# EAGLE board Prova 2 Conversor AD_DA (EAGLE 9.7.0)

Size 197.69 x 96.3 mm. Coordinates in mm from the lower left corner, seen from the top.
Outline: 0,0 197.69,0 197.69,96.3 0,96.3 0,0
Copper layers (1*16): Top 0.035mm / dielectric 1.5mm / Bottom 0.035mm
Design rules "default": minimum track width 6mil, minimum drill 0.35mm, track to track 6mil, track to pad 6mil, pad to pad 6mil, via to via 6mil, smd to smd 6mil, copper to edge 40mil, drill to drill 6mil, minimum pad ring 10mil, minimum via ring 8mil, stop-mask expansion 4mil, vias tented up to drill 0mil, thermal gap 10mil

## Footprints (pad centres in the part's own frame; a part is rotated, then mirrored left to right if it is on the bottom)
BATTERY-GENERIC = drill 1.118 pad 3.15 octagon: + 2.54,0; - -2.54,0
RESAD1016W63L850D250B = drill 0.83 pad 1.43: 1 -5.08,0; 2 5.08,0
ARDUINO-UNO-R3-SHIELD = drill 1.016 pad 1.88: 3.3V 24.13,-2.54; 5V 24.13,0; A0 24.13,12.7; A1 24.13,15.24; A2 24.13,17.78; A3 24.13,20.32; A4 24.13,22.86; A5 24.13,25.4; AREF -24.13,-13.97; D2 -24.13,20.32; D3 -24.13,17.78; D4 -24.13,15.24; D5 -24.13,12.7; D6 -24.13,10.16; D7 -24.13,7.62; D8 -24.13,3.81; D9 -24.13,1.27; D10 -24.13,-1.27; D11 -24.13,-3.81; D12 -24.13,-6.35; D13 -24.13,-8.89; GND@0 24.13,2.54; GND@1 24.13,5.08; GND@2 -24.13,-11.43; IOREF 24.13,-7.62; NC 24.13,-10.16; RES 24.13,-5.08; RX -24.13,25.4; SCL -24.13,-19.05; SDA -24.13,-16.51; TX -24.13,22.86; VIN 24.13,7.62

## Placement (x,y rotation side)
FUNC2  FUNCTION-GENERATOR  [BATTERY-GENERIC]  151.39,8.26 180 top
R3  2.2k  [RESAD1016W63L850D250B]  191.36,43.92 90 top
R4  2.2k  [RESAD1016W63L850D250B]  191.36,64.24 90 top
UUNO_ARDUINO  ARDUINO-UNO-R3-SHIELD  [ARDUINO-UNO-R3-SHIELD]  47.88,66.45 270 top

## Library data of the parts
FUNC2 R3 R4 UUNO_ARDUINO = Tinkercad

## Nets
FUNC2+: FUNC2.+ R3.1
FUNC2-: FUNC2.- UUNO_ARDUINO.GND@0 UUNO_ARDUINO.GND@1 UUNO_ARDUINO.GND@2
UUNO_ARDUINO_5V: R4.2 UUNO_ARDUINO.5V
UUNO_ARDUINO_A0: R3.2 R4.1 UUNO_ARDUINO.A0

## Tracks (layer width: path | path; a pad name or v marks a point on that pad's centre or on a via)
FUNC2+  (1 unrouted)
FUNC2-  (3 unrouted)
UUNO_ARDUINO_5V  (1 unrouted)
UUNO_ARDUINO_A0  (2 unrouted)